# Altium PCB PCB.PcbDoc (part 5 of 6)
Units mm, origin at the board's own origin, x right, y up, seen from the top; angles counter-clockwise.
Board outline 56.61 x 57.68 mm, 2 copper layers (Top Layer, Bottom Layer), stack 0.572 mm thick; 104 components, 100 nets, 551 pads, 332 vias.
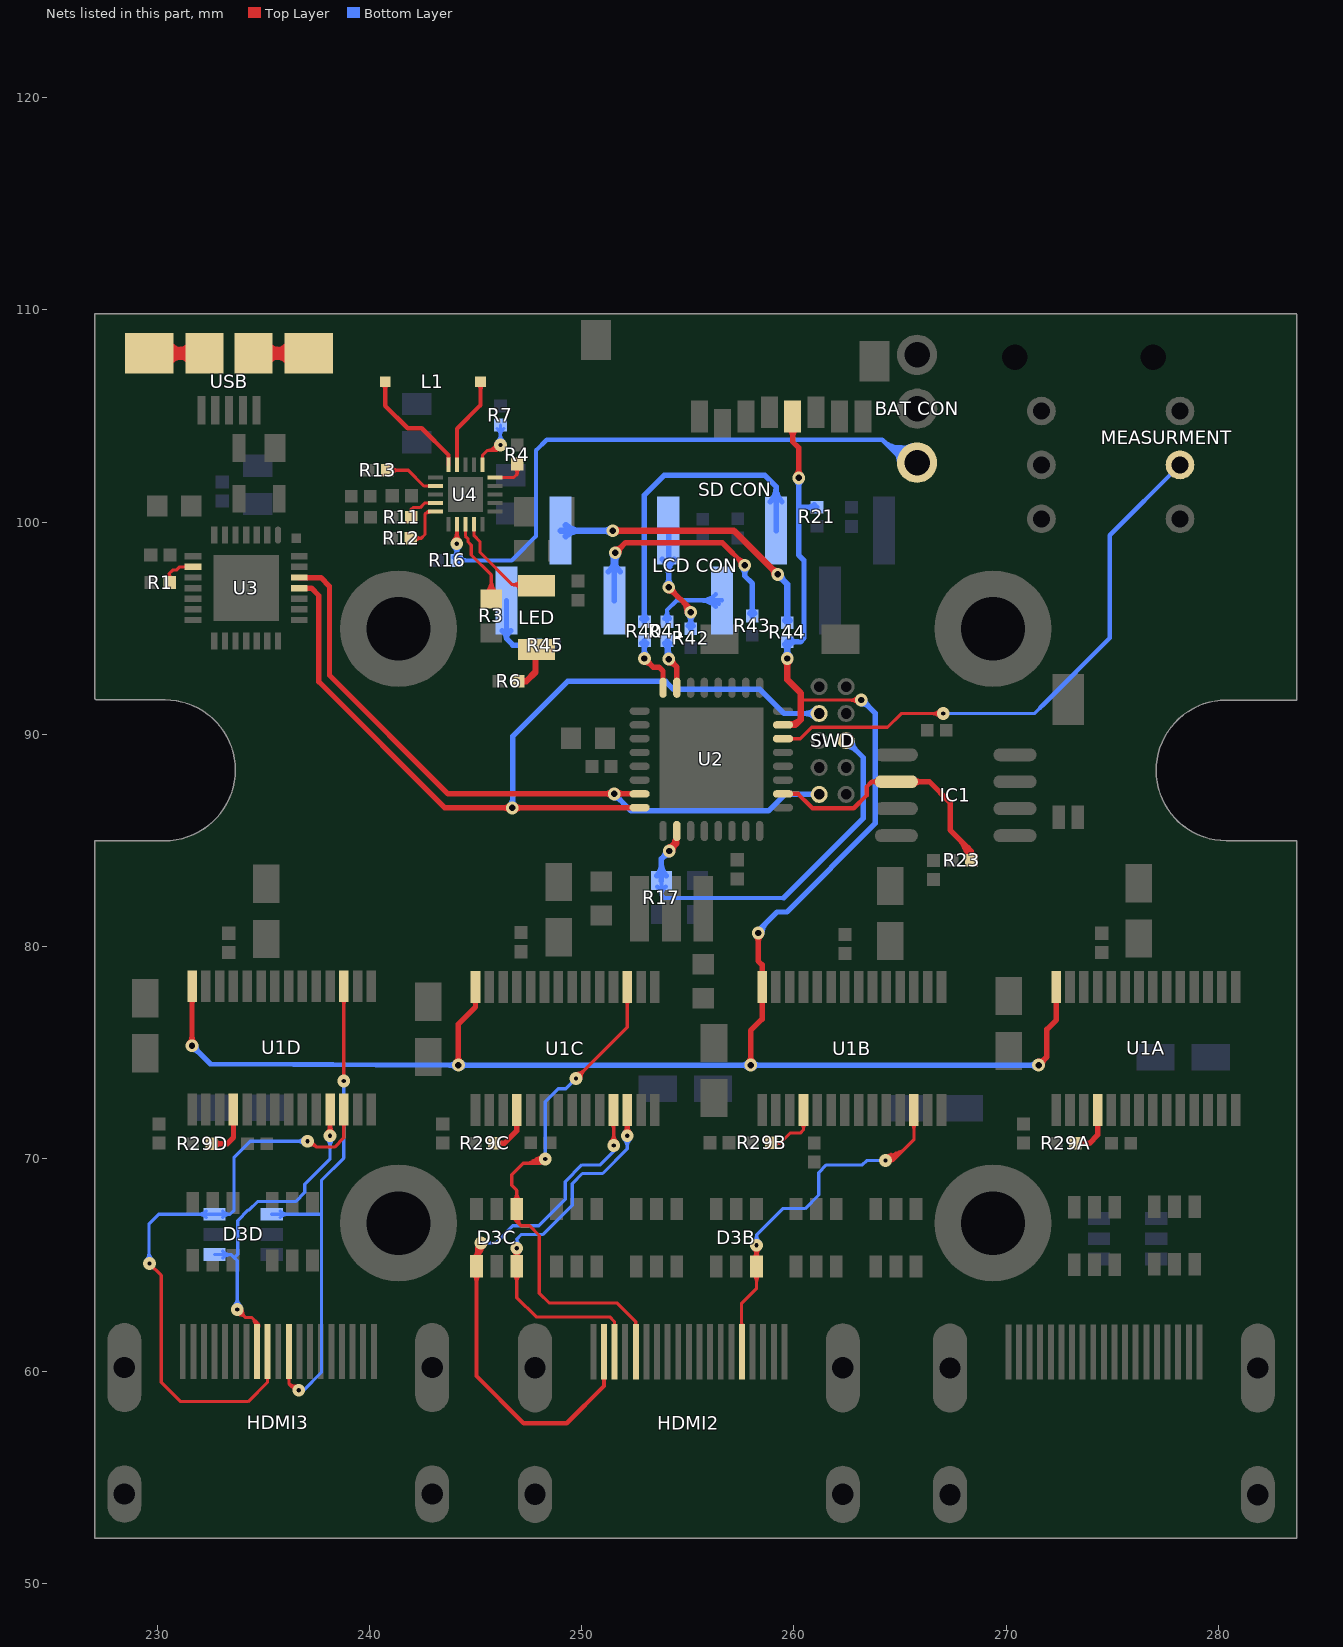
[diagram p5: the nets of this part, all layers, seen from the top]

## Via types
v1: diameter 0.6, hole 0.3, Top Layer to Bottom Layer, tented both sides, 242 vias
v2: diameter 0.6, hole 0.2, Top Layer to Bottom Layer, tented both sides, 80 vias
v3: diameter 0.8, hole 0.4, Top Layer to Bottom Layer, tented both sides, 9 vias
v4: diameter 0.66, hole 0.33, Top Layer to Bottom Layer, tented both sides, 1 vias

## Nets (pads, with @x,y where several pads share a name; then routed paths per layer and width w, separated by ;. In a path a pad name is that pad's centre, name@x,y a point inside that pad or via, vN(x,y) a via of type N, cw(c..) or ccw(c..) an arc to the next point about the centre after c; other vN are vias at no path point) (continued)
NetD3B_6: D3B.6 HDMI2.5 U1B.12 | length 36.6
  Top Layer w0.152: HDMI2.5@257.535,60.947 257.535,63.2 258.242,63.906 v2(258.242,65.938) ; D3B.6@258.118,65.355 ccw(c258.02,65.512) 258.199,65.559 ; D3B.6@258.125,65.359 ccw(c257.949,65.663) 258.288,65.572 ; 258.201,65.552 ccw(c258.508,65.634) D3B.6@258.349,65.359 ; 258.289,65.575 ccw(c258.499,65.519) D3B.6@258.37,65.345 ; v2@264.242,69.967 cw(c264.712,69.695) 264.572,70.219 ; v2(264.312,69.926) 264.668,69.926 ; v2@264.374,69.891 cw(c265.163,69.435) 264.927,70.315 ; v2@264.376,69.893 cw(c264.701,69.721) 264.606,70.076 ; v2@264.424,70.12 ccw(c264.577,70.384) 264.656,70.09 ; U1B.12@265.65,72.3 265.65,70.909 264.668,69.926 ; v2@258.113,65.756 cw(c257.994,65.588) 258.193,65.535 ; v2@258.113,65.756 cw(c257.994,65.588) 258.193,65.535 ; v2@258.113,65.756 cw(c257.994,65.588) 258.193,65.535 ; v2@258.13,65.745 cw(c257.968,65.464) 258.281,65.548 ; v2@258.13,65.745 cw(c257.968,65.464) 258.281,65.548 ; v2@258.13,65.745 cw(c257.968,65.464) 258.281,65.548 ; 258.193,65.535 cw(c258.526,65.446) v2@258.354,65.745 ; 258.193,65.535 cw(c258.526,65.446) v2@258.354,65.745 ; 258.193,65.535 cw(c258.526,65.446) v2@258.354,65.745 ; D3B.6@258.242,65.398 ccw(c257.702,65.398) 258.084,65.78 cw(c257.702,65.398) D3B.6@258.242,65.398 ; D3B.6@258.242,65.398 cw(c258.782,65.398) 258.4,65.78 ccw(c258.782,65.398) D3B.6@258.242,65.398 ; 258.283,65.538 cw(c258.472,65.588) v2@258.365,65.751 ; 258.283,65.538 cw(c258.472,65.588) v2@258.365,65.751 ; 258.283,65.538 cw(c258.472,65.588) v2@258.365,65.751 ; 264.668,69.926 ccw(c264.668,69.756) 264.514,69.829 cw(c264.668,69.756) 264.668,69.926 ; 264.668,69.926 cw(c264.668,70.097) 264.514,70.023 ccw(c264.668,70.097) 264.668,69.926 ; 265.65,71.416 ccw(c265.291,71.416) 265.545,71.67 cw(c265.291,71.416) 265.65,71.416 ; 265.65,71.416 cw(c266.01,71.416) 265.756,71.67 ccw(c266.01,71.416) 265.65,71.416 ; 257.535,62.279 ccw(c257.747,62.279) 257.598,62.129 cw(c257.747,62.279) 257.535,62.279 ; D3B.6@258.079,64.557 cw(c257.684,64.163) 258.242,64.163 ccw(c257.684,64.163) D3B.6@258.079,64.557 ; D3B.6@258.079,65.323 ccw(c257.684,65.718) 258.242,65.718 cw(c257.684,65.718) D3B.6@258.079,65.323 ; 258.242,64.187 cw(c258.765,64.187) 258.395,64.557 ccw(c258.765,64.187) 258.242,64.187 ; v2@258.242,65.693 ccw(c258.765,65.693) 258.395,65.323 cw(c258.765,65.693) v2@258.242,65.693 ; v2@264.312,69.845 ccw(c264.312,70.508) 264.781,70.039 cw(c264.312,70.508) v2@264.312,69.845 ; v2@264.312,69.998 ccw(c264.312,71.028) 265.041,70.3 cw(c264.312,71.028) v2@264.312,69.998 ; v2@264.312,70.15 ccw(c264.312,71.549) 265.301,70.56 cw(c264.312,71.549) v2@264.312,70.15
  Bottom Layer w0.152: v2(258.242,65.938) 258.242,66.432 ; 259.523,67.666 259.639,67.666 ; v2(264.312,69.926) 263.423,69.926 263.22,69.723 261.533,69.723 261.168,69.358 261.168,68.305 260.528,67.666 259.639,67.666 ; 258.242,66.432 ccw(c258.674,66.432) 258.389,66.107 cw(c258.674,66.432) 258.242,66.432 ; 258.242,66.432 cw(c257.81,66.432) 258.094,66.107 ccw(c257.81,66.432) 258.242,66.432 ; 258.242,66.432 259.475,67.666 259.639,67.666
NetD3C_1: D3C.1 HDMI2.15 U1C.17 | length 39.5
  Top Layer w0.152: 247.682,69.904 cw(c247.866,69.585) v2@248.126,69.845 ; 247.853,70.003 cw(c248.011,69.73) v2@248.234,69.952 ; 247.881,69.849 cw(c247.998,69.646) v2@248.145,69.828 ; 247.927,69.875 ccw(c247.774,70.139) v2@248.069,70.06 ; v2(248.285,70.002) 248.082,69.799 247.244,69.799 246.71,69.266 246.71,68.758 246.949,68.519 D3C.1@246.949,67.644 246.949,67.046 ; v2@249.653,73.803 cw(c249.972,73.738) 249.888,74.052 ; v2(249.733,73.787) 252.15,76.205 252.15,76.454 ; v2@249.749,73.708 ccw(c249.684,74.027) 249.998,73.942 ; 252.15,76.357 252.15,76.454 ; U1C.17@252.15,78.1 252.15,76.454 ; HDMI2.15@252.552,60.922 252.552,62.332 251.663,63.221 248.463,63.221 248.006,63.678 248.006,66.396 247.548,66.853 247.142,66.853 ; 246.949,67.046 ccw(c246.75,67.046) 246.844,67.222 cw(c246.75,67.046) 246.949,67.046 ; 246.949,67.046 cw(c247.148,67.046) 247.054,67.222 ccw(c247.148,67.046) 246.949,67.046 ; 246.949,67.046 247.142,66.853 ; 246.949,68.409 ccw(c247.489,68.409) 247.107,68.027 cw(c247.489,68.409) 246.949,68.409 ; 246.949,68.409 cw(c246.409,68.409) 246.791,68.027 ccw(c246.409,68.409) 246.949,68.409 ; 247.142,66.853 cw(c247.365,67.076) 247.122,67.277 ccw(c247.365,67.076) 247.142,66.853 ; 250.115,74.169 ccw(c250.497,73.787) 249.957,73.787 cw(c250.497,73.787) 250.115,74.169 ; 250.115,74.169 cw(c249.733,74.551) 249.733,74.011 ccw(c249.733,74.551) 250.115,74.169 ; 252.15,77.216 ccw(c251.791,77.216) 252.045,77.47 cw(c251.791,77.216) 252.15,77.216 ; 252.15,77.216 cw(c252.51,77.216) 252.256,77.47 ccw(c252.51,77.216) 252.15,77.216 ; 252.552,62.238 ccw(c252.707,62.238) 252.598,62.129 cw(c252.707,62.238) 252.552,62.238 ; 252.552,62.237 cw(c252.399,62.237) 252.507,62.129 ccw(c252.399,62.237) 252.552,62.237 ; D3C.1@246.887,67.471 ccw(c247.105,67.29) 246.905,67.09 cw(c247.105,67.29) D3C.1@246.887,67.471 ; D3C.1@247.004,67.374 ccw(c247.235,67.183) 247.023,66.971 cw(c247.235,67.183) D3C.1@247.004,67.374 ; 247.254,69.799 ccw(c247.254,71.033) 248.127,70.161 cw(c247.254,71.033) 247.254,69.799 ; 247.622,69.799 ccw(c247.622,70.665) 248.235,70.053 cw(c247.622,70.665) 247.622,69.799 ; 247.99,69.799 ccw(c247.99,70.297) 248.342,69.945 cw(c247.99,70.297) 247.99,69.799
  Bottom Layer w0.152: v2(248.285,70.002) 248.285,72.695 248.899,73.309 249.255,73.309 v2(249.733,73.787)
NetD3C_4: D3C.4 HDMI2.18 U1C.11 | length 43.2
  Top Layer w0.152: D3C.4@244.937,65.363 ccw(c244.748,65.69) 245.113,65.592 ; D3C.4@245.049,64.944 245.049,65.827 ; v2@245.083,65.906 cw(c244.874,65.751) 245.1,65.62 ; v2@245.102,65.884 cw(c244.832,65.621) D3C.4@245.157,65.431 ; 245.135,65.682 cw(c245.399,65.529) v2@245.32,65.824 ; 245.148,65.723 ccw(c245.624,65.596) D3C.4@245.229,65.302 ; 245.205,65.567 ccw(c245.57,65.47) D3C.4@245.243,65.281 ; v2@245.211,65.99 cw(c244.981,65.766) 245.258,65.604 ; v2(245.262,66.04) 245.049,65.827 ; v2(251.511,70.637) 251.511,71.476 ; 251.511,71.349 251.511,71.476 ; U1C.11@251.511,72.29 251.511,71.476 ; 245.049,65.709 ccw(c245.589,65.709) 245.207,65.327 cw(c245.589,65.709) 245.049,65.709 ; 245.049,65.709 cw(c244.509,65.709) 244.891,65.327 ccw(c244.509,65.709) 245.049,65.709 ; 245.049,65.827 ccw(c244.984,65.891) 245.065,65.935 cw(c244.984,65.891) 245.049,65.827 ; 245.049,65.827 cw(c245.114,65.762) 245.157,65.843 ccw(c245.114,65.762) 245.049,65.827 ; U1C.11@251.395,71.67 cw(c251.116,71.391) 251.511,71.391 ; U1C.11@251.395,71.67 cw(c251.116,71.391) 251.511,71.391 ; U1C.11@251.395,71.67 cw(c251.116,71.391) 251.511,71.391 ; U1C.11@251.395,71.67 cw(c251.116,71.391) 251.511,71.391 ; U1C.11@251.417,71.652 cw(c251.298,71.475) 251.511,71.475 ; U1C.11@251.417,71.652 cw(c251.298,71.475) 251.511,71.475 ; U1C.11@251.417,71.652 cw(c251.298,71.475) 251.511,71.475 ; U1C.11@251.417,71.652 cw(c251.298,71.475) 251.511,71.475 ; U1C.11@251.417,71.652 cw(c251.298,71.475) 251.511,71.475 ; U1C.11@251.417,71.652 cw(c251.298,71.475) 251.511,71.475 ; 251.511,71.178 ccw(c252.051,71.178) 251.669,70.796 cw(c252.051,71.178) 251.511,71.178 ; 251.511,71.178 cw(c250.971,71.178) 251.353,70.796 ccw(c250.971,71.178) 251.511,71.178 ; 251.511,71.441 cw(c251.835,71.441) U1C.11@251.606,71.67 ; 251.511,71.441 cw(c251.835,71.441) U1C.11@251.606,71.67 ; 251.511,71.441 cw(c251.835,71.441) U1C.11@251.606,71.67 ; 251.511,71.441 cw(c251.835,71.441) U1C.11@251.606,71.67 ; 251.511,71.475 cw(c251.755,71.475) U1C.11@251.597,71.662 ; 251.511,71.475 cw(c251.755,71.475) U1C.11@251.597,71.662 ; 251.511,71.475 cw(c251.755,71.475) U1C.11@251.597,71.662 ; 251.511,71.475 cw(c251.755,71.475) U1C.11@251.597,71.662 ; 251.511,71.475 cw(c251.755,71.475) U1C.11@251.597,71.662 ; 251.511,71.475 cw(c251.755,71.475) U1C.11@251.597,71.662 ; D3C.4@245.049,64.985 cw(c246.318,64.985) 245.421,65.882 ccw(c246.318,64.985) D3C.4@245.049,64.985 ; D3C.4@245.049,65.352 cw(c245.95,65.352) 245.313,65.99 ccw(c245.95,65.352) D3C.4@245.049,65.352 ; 245.049,65.72 cw(c245.582,65.72) 245.205,66.097 ccw(c245.582,65.72) 245.049,65.72
  Top Layer w0.203: D3C.4@245.049,64.944 245.049,59.776 247.269,57.556 249.301,57.556 251.052,59.308 HDMI2.18@251.052,60.924 ; 245.049,64.24 ccw(c244.57,64.24) 244.909,64.579 cw(c244.57,64.24) 245.049,64.24 ; 245.049,64.24 cw(c245.528,64.24) 245.189,64.579 ccw(c245.528,64.24) 245.049,64.24
  Bottom Layer w0.152: v2(245.262,66.04) 245.948,66.04 246.761,66.853 247.98,66.853 249.225,68.097 249.225,68.936 250.012,69.723 250.876,69.723 251.511,70.358 v2(251.511,70.637) v2@251.511,70.561
NetD3C_6: D3C.6 HDMI2.17 U1C.12 | length 33.3
  Top Layer w0.152: D3C.6@246.834,65.361 ccw(c246.775,65.461) 246.887,65.491 ccw(c247.026,65.528) D3C.6@246.996,65.388 ; D3C.6@246.902,65.388 ccw(c246.872,65.528) 247.011,65.491 ccw(c247.123,65.461) D3C.6@247.064,65.361 ; v2(246.949,65.801) D3C.6@246.949,64.944 246.949,63.464 247.853,62.56 251.333,62.56 251.55,62.343 HDMI2.17@251.55,60.92 ; U1C.12@252.035,71.681 cw(c251.813,71.498) 252.091,71.424 ; U1C.12@252.076,71.646 cw(c251.963,71.451) 252.181,71.509 ; 252.111,71.497 cw(c252.347,71.434) U1C.12@252.225,71.646 ; v2(252.146,71.095) 252.15,71.099 U1C.12@252.15,72.3 ; 252.203,71.427 cw(c252.465,71.497) U1C.12@252.262,71.676 ; v2@246.834,65.609 cw(c246.775,65.509) 246.887,65.479 ; v2@246.834,65.609 cw(c246.775,65.509) 246.887,65.479 ; v2@246.834,65.609 cw(c246.775,65.509) 246.887,65.479 ; 246.887,65.479 cw(c247.026,65.442) v2@246.996,65.582 ; 246.887,65.479 cw(c247.026,65.442) v2@246.996,65.582 ; 246.887,65.479 cw(c247.026,65.442) v2@246.996,65.582 ; v2@246.902,65.582 cw(c246.872,65.442) 247.011,65.479 ; v2@246.902,65.582 cw(c246.872,65.442) 247.011,65.479 ; v2@246.902,65.582 cw(c246.872,65.442) 247.011,65.479 ; 246.949,64.179 ccw(c246.409,64.179) 246.791,64.561 cw(c246.409,64.179) 246.949,64.179 ; 246.949,64.179 cw(c247.489,64.179) 247.107,64.561 ccw(c247.489,64.179) 246.949,64.179 ; D3C.6@246.949,65.261 ccw(c246.409,65.261) 246.791,65.643 cw(c246.409,65.261) D3C.6@246.949,65.261 ; D3C.6@246.949,65.261 cw(c247.489,65.261) 247.107,65.643 ccw(c247.489,65.261) D3C.6@246.949,65.261 ; v2@246.949,65.709 ccw(c247.489,65.709) 247.107,65.327 cw(c247.489,65.709) v2@246.949,65.709 ; v2@246.949,65.709 cw(c246.409,65.709) 246.791,65.327 ccw(c246.409,65.709) v2@246.949,65.709 ; 247.011,65.479 cw(c247.123,65.509) v2@247.064,65.609 ; 247.011,65.479 cw(c247.123,65.509) v2@247.064,65.609 ; 247.011,65.479 cw(c247.123,65.509) v2@247.064,65.609 ; 252.15,71.416 ccw(c251.791,71.416) 252.045,71.67 cw(c251.791,71.416) 252.15,71.416 ; 252.15,71.416 cw(c252.51,71.416) 252.256,71.67 ccw(c252.51,71.416) 252.15,71.416 ; HDMI2.17@251.507,62.129 ccw(c251.404,62.232) 251.55,62.232 cw(c251.404,62.232) HDMI2.17@251.507,62.129 ; 251.55,62.243 ccw(c251.712,62.243) 251.598,62.129 cw(c251.712,62.243) 251.55,62.243 ; v2@251.988,71.253 ccw(c251.594,71.646) 252.15,71.646 cw(c251.594,71.646) v2@251.988,71.253 ; U1C.12@252.15,71.624 ccw(c252.675,71.624) 252.304,71.253 cw(c252.675,71.624) U1C.12@252.15,71.624
  Bottom Layer w0.152: v2(246.949,65.801) 246.949,66.229 ; v2(252.146,71.095) 252.149,71.095 252.15,71.093 252.15,70.479 250.988,69.317 250.037,69.317 249.555,68.835 249.555,67.818 248.183,66.446 247.167,66.446 246.949,66.229 ; 246.949,66.229 ccw(c247.245,66.229) 247.077,65.985 cw(c247.245,66.229) 246.949,66.229 ; 246.949,66.229 cw(c246.653,66.229) 246.821,65.985 ccw(c246.653,66.229) 246.949,66.229 ; v2@251.988,70.936 cw(c251.594,70.543) 252.15,70.543 ccw(c251.594,70.543) v2@251.988,70.936 ; 252.15,70.565 cw(c252.675,70.565) 252.304,70.936 ccw(c252.675,70.565) 252.15,70.565
NetD3D_1: D3D.1 HDMI3.9 U1D.17 | length 30.8
  Top Layer w0.152: HDMI3.9@236.211,60.935 236.211,59.42 ; 236.344,59.311 cw(c236.362,58.768) v2@236.732,59.165 ; v2(236.677,59.106) 236.525,59.106 236.211,59.42 ; v2(238.8,73.67) 238.8,76.606 ; 238.8,75.555 238.8,76.606 ; U1D.17@238.8,78.139 238.8,76.606 ; 236.211,59.42 ccw(c236.495,59.704) 236.612,59.32 cw(c236.495,59.704) 236.211,59.42 ; 236.211,59.621 ccw(c236.057,59.621) 236.165,59.729 cw(c236.057,59.621) 236.211,59.621 ; 236.211,59.621 cw(c236.365,59.621) 236.256,59.729 ccw(c236.365,59.621) 236.211,59.621 ; 238.8,77.255 ccw(c238.441,77.255) 238.695,77.509 cw(c238.441,77.255) 238.8,77.255 ; 238.8,77.255 cw(c239.16,77.255) 238.906,77.509 ccw(c239.16,77.255) 238.8,77.255 ; 236.39,59.241 ccw(c236.579,59.429) 236.656,59.174 cw(c236.579,59.429) 236.39,59.241
  Bottom Layer w0.152: D3D.1@235.407,67.396 236.626,67.396 ; v2(236.677,59.106) 236.906,59.106 237.744,59.944 237.744,68.986 238.785,70.028 ; 236.692,67.396 236.626,67.396 ; 237.2,67.396 237.109,67.396 ; 237.708,67.396 237.109,67.396 ; 238.8,70.043 v2(238.8,73.67) ; 236.172,67.396 ccw(c236.172,66.856) 235.79,67.238 cw(c236.172,66.856) 236.172,67.396 ; 236.172,67.396 cw(c236.172,67.937) 235.79,67.555 ccw(c236.172,67.937) 236.172,67.396 ; 236.626,67.396 237.109,67.396
NetD3D_4: D3D.4 HDMI3.12 U1D.11 | length 29.3
  Top Layer w0.152: v2@233.702,62.899 ccw(c234.022,62.966) 233.938,62.651 ; v2(233.782,62.916) 234.163,62.535 ; v2@233.798,62.995 cw(c233.731,62.676) 234.047,62.759 ; 234.576,62.373 ccw(c234.929,62.463) HDMI3.12@234.743,62.15 ; HDMI3.12@234.711,60.935 234.711,62.292 234.467,62.535 ; U1D.11@238.037,71.718 cw(c237.805,71.521) 238.099,71.442 ; U1D.11@238.076,71.685 cw(c237.976,71.511) 238.17,71.563 ; 238.131,71.563 cw(c238.325,71.511) U1D.11@238.225,71.685 ; v2(238.15,71.095) U1D.11@238.15,72.339 ; 238.202,71.442 cw(c238.496,71.521) U1D.11@238.264,71.718 ; 234.163,62.535 ccw(c233.783,62.155) 233.782,62.692 cw(c233.783,62.155) 234.163,62.535 ; 234.163,62.535 cw(c234.542,62.914) 234.005,62.915 ccw(c234.542,62.914) 234.163,62.535 ; 234.163,62.535 234.467,62.535 ; 234.467,62.535 cw(c234.034,62.102) 234.647,62.095 ccw(c234.034,62.102) 234.467,62.535 ; 234.711,62.249 ccw(c234.865,62.249) 234.756,62.14 cw(c234.865,62.249) 234.711,62.249 ; 234.711,62.249 cw(c234.557,62.249) 234.665,62.14 ccw(c234.557,62.249) 234.711,62.249 ; 238.15,71.455 ccw(c237.791,71.455) 238.045,71.709 cw(c237.791,71.455) 238.15,71.455 ; 238.15,71.455 cw(c238.51,71.455) 238.256,71.709 ccw(c238.51,71.455) 238.15,71.455 ; U1D.11@238.15,71.635 ccw(c238.691,71.635) 238.309,71.253 cw(c238.691,71.635) U1D.11@238.15,71.635 ; U1D.11@238.15,71.635 cw(c237.61,71.635) 237.992,71.253 ccw(c237.61,71.635) U1D.11@238.15,71.635 ; 234.724,62.278 cw(c234.542,62.096) 234.799,62.094 ccw(c234.542,62.096) 234.724,62.278
  Bottom Layer w0.152: D3D.4@232.707,65.496 233.504,65.496 233.643,65.357 ; v2(233.782,62.916) 233.782,65.218 233.643,65.357 ; v2(238.15,71.095) 238.15,70.002 236.957,68.809 236.957,68.428 236.525,67.996 234.732,67.996 234.339,67.602 234.302,67.602 233.8,67.1 233.8,65.515 233.643,65.357 ; 233.472,65.496 ccw(c233.472,64.956) 233.09,65.338 cw(c233.472,64.956) 233.472,65.496 ; 233.472,65.496 cw(c233.472,66.037) 233.09,65.655 ccw(c233.472,66.037) 233.472,65.496 ; 233.782,63.456 ccw(c234.322,63.456) 233.94,63.074 cw(c234.322,63.456) 233.782,63.456 ; 233.782,63.456 cw(c233.241,63.456) 233.623,63.074 ccw(c233.241,63.456) 233.782,63.456 ; 238.15,70.554 ccw(c237.61,70.554) 237.992,70.936 cw(c237.61,70.554) 238.15,70.554 ; 238.15,70.554 cw(c238.691,70.554) 238.309,70.936 ccw(c238.691,70.554) 238.15,70.554
NetD3D_6: D3D.6 HDMI3.11 U1D.12 | length 39.2
  Top Layer w0.152: v2(229.641,65.075) 230.2,64.516 ; 230.2,64.491 230.2,59.487 231.115,58.572 234.29,58.572 235.204,59.487 HDMI3.11@235.204,60.928 ; v2(237.084,70.841) 237.236,70.841 237.515,70.561 ; U1D.12@238.8,72.339 238.8,70.997 238.365,70.561 237.515,70.561 ; 237.515,70.561 ccw(c237.287,70.333) 237.167,70.633 cw(c237.287,70.333) 237.515,70.561 ; 238.8,71.455 ccw(c238.441,71.455) 238.695,71.709 cw(c238.441,71.455) 238.8,71.455 ; 238.8,71.455 cw(c239.16,71.455) 238.906,71.709 ccw(c239.16,71.455) 238.8,71.455 ; 235.204,59.605 cw(c235.381,59.605) 235.256,59.729 ccw(c235.381,59.605) 235.204,59.605
  Bottom Layer w0.152: v2(229.641,65.075) 229.616,65.1 229.616,66.929 230.083,67.396 D3D.6@232.707,67.396 233.436,67.396 ; 233.629,69.342 233.629,69.52 ; v2@236.906,70.841 236.601,70.841 ; v2(237.084,70.841) 236.601,70.841 ; 231.942,67.396 ccw(c231.942,67.937) 232.324,67.555 cw(c231.942,67.937) 231.942,67.396 ; 231.942,67.396 cw(c231.942,66.856) 232.324,67.238 ccw(c231.942,66.856) 231.942,67.396 ; 233.436,67.396 ccw(c233.436,66.941) 233.098,67.246 cw(c233.436,66.941) 233.436,67.396 ; 233.436,67.396 cw(c233.436,67.852) 233.098,67.546 ccw(c233.436,67.852) 233.436,67.396 ; 233.436,67.396 233.629,67.589 233.629,69.52 ; 233.629,69.52 233.629,70.079 234.391,70.841 236.601,70.841 ; 236.601,70.841 ccw(c236.601,71.249) v2@236.913,70.985 ; 236.601,70.841 cw(c236.601,70.432) v2@236.913,70.696 ; 236.601,70.841 ccw(c236.601,71.249) v2@236.913,70.985 ; 236.601,70.841 cw(c236.601,70.432) v2@236.913,70.696 ; 236.601,70.841 ccw(c236.601,71.249) v2@236.913,70.985 ; 236.601,70.841 cw(c236.601,70.432) v2@236.913,70.696 ; 236.601,70.841 ccw(c236.601,71.249) v2@236.913,70.985 ; 236.601,70.841 cw(c236.601,70.432) v2@236.913,70.696 ; v2@229.483,65.233 ccw(c229.162,65.554) 229.616,65.554 cw(c229.162,65.554) v2@229.483,65.233 ; 229.616,65.676 ccw(c230.243,65.676) 229.8,65.233 cw(c230.243,65.676) 229.616,65.676
NetL1_1: L1.1 U4.10 | length 6.7
  Top Layer w0.203: L1.1@240.743,106.604 240.743,105.485 241.808,104.419 242.468,104.419 243.725,103.162 U4.10@243.725,102.7 ; 240.743,106.246 ccw(c240.384,106.246) 240.638,106.499 cw(c240.384,106.246) 240.743,106.246 ; 240.743,106.246 cw(c241.101,106.246) 240.848,106.499 ccw(c241.101,106.246) 240.743,106.246
NetL1_2: L1.2 U4.9 | length 5.5
  Top Layer w0.203: U4.9@244.125,102.7 244.125,104.4 245.237,105.512 L1.2@245.237,106.604 ; 245.237,106.246 ccw(c244.879,106.246) 245.132,106.499 cw(c244.879,106.246) 245.237,106.246 ; 245.237,106.246 cw(c245.595,106.246) 245.342,106.499 ccw(c245.595,106.246) 245.237,106.246
"NetLCD CON_3": "LCD CON.3" R40.2 | length 19.1
  Bottom Layer w0.254: R40.2@252.959,95.312 252.959,101.27 253.898,102.21 258.623,102.21 259.16,101.672 259.16,99.602 ; 252.959,95.729 ccw(c253.376,95.729) 253.081,95.434 cw(c253.376,95.729) 252.959,95.729 ; 252.959,95.729 cw(c252.541,95.729) 252.836,95.434 ccw(c252.541,95.729) 252.959,95.729 ; 259.16,101.632 ccw(c260.11,101.632) 259.438,100.96 cw(c260.11,101.632) 259.16,101.632 ; 259.16,101.632 cw(c258.21,101.632) 258.882,100.96 ccw(c258.21,101.632) 259.16,101.632
"NetLCD CON_4": "LCD CON.4" R41.2 | length 8.9
  Bottom Layer w0.203: R41.2@254.025,95.312 254.025,95.86 254.478,96.312 256.608,96.312 ; 254.025,95.791 ccw(c254.504,95.791) 254.166,95.452 cw(c254.504,95.791) 254.025,95.791 ; 254.025,95.791 cw(c253.546,95.791) 253.885,95.452 ccw(c253.546,95.791) 254.025,95.791 ; 255.579,96.312 cw(c255.579,95.259) 256.324,96.004 ccw(c255.579,95.259) 255.579,96.312 ; 255.637,96.312 ccw(c255.637,97.283) 256.324,96.596 cw(c255.637,97.283) 255.637,96.312 ; 256.07,96.312 cw(c256.07,95.75) 256.467,96.147 ccw(c256.07,95.75) 256.07,96.312
"NetLCD CON_5": "LCD CON.5" R42.2 | length 14.4
  Top Layer w0.254: v1(254.102,96.926) 255.143,95.885 v1(255.143,95.758) ; 254.397,96.631 ccw(c254.102,96.336) 254.102,96.753 cw(c254.102,96.336) 254.397,96.631 ; 254.397,96.631 cw(c254.692,96.926) 254.275,96.926 ccw(c254.692,96.926) 254.397,96.631 ; 254.758,96.27 cw(c254.246,95.758) 254.97,95.758 ccw(c254.246,95.758) 254.758,96.27
  Bottom Layer w0.254: v1(254.102,96.926) 254.102,99.58 ; R42.2@255.143,94.982 v1(255.143,95.758) ; 254.102,97.344 ccw(c254.519,97.344) 254.224,97.049 cw(c254.519,97.344) 254.102,97.344 ; 254.102,97.344 cw(c253.684,97.344) 253.979,97.049 ccw(c253.684,97.344) 254.102,97.344 ; 255.143,95.34 ccw(c254.725,95.34) 255.021,95.636 cw(c254.725,95.34) 255.143,95.34 ; 255.143,95.34 cw(c255.561,95.34) 255.265,95.636 ccw(c255.561,95.34) 255.143,95.34 ; 255.143,95.399 ccw(c255.561,95.399) 255.265,95.104 cw(c255.561,95.399) 255.143,95.399 ; 255.143,95.399 cw(c254.725,95.399) 255.021,95.104 ccw(c254.725,95.399) 255.143,95.399 ; 253.802,98.244 cw(c253.077,97.52) 254.102,97.52 ccw(c253.077,97.52) 253.802,98.244 ; 254.102,97.624 cw(c254.978,97.624) 254.358,98.244 ccw(c254.978,97.624) 254.102,97.624
"NetLCD CON_6": "LCD CON.6" R43.2 | length 24
  Top Layer w0.254: v1(251.587,98.552) 252.07,99.035 256.616,99.035 v1(257.683,97.968) ; 251.882,98.847 ccw(c252.178,98.552) 251.76,98.552 cw(c252.178,98.552) 251.882,98.847 ; 251.882,98.847 cw(c251.587,99.143) 251.587,98.725 ccw(c251.587,99.143) 251.882,98.847 ; 257.388,98.263 ccw(c257.683,98.558) 257.683,98.141 cw(c257.683,98.558) 257.388,98.263 ; 257.388,98.263 cw(c257.092,97.968) 257.51,97.968 ccw(c257.092,97.968) 257.388,98.263
  Bottom Layer w0.254: 251.536,96.304 251.536,98.501 v1(251.587,98.552) ; v1(257.683,97.968) 257.683,97.46 258.039,97.104 R43.2@258.039,95.573 ; v1@251.437,98.466 cw(c251.044,98.238) 251.483,98.121 ; v1@251.437,98.466 cw(c251.044,98.238) 251.483,98.121 ; v1@251.437,98.466 cw(c251.044,98.238) 251.483,98.121 ; 251.496,98.171 cw(c251.864,98.072) v1@251.673,98.402 ; 251.496,98.171 cw(c251.864,98.072) v1@251.673,98.402 ; 251.496,98.171 cw(c251.864,98.072) v1@251.673,98.402 ; 251.619,98.032 cw(c252.04,98.145) v1@251.716,98.436 ; 251.619,98.032 cw(c252.04,98.145) v1@251.716,98.436 ; 251.619,98.032 cw(c252.04,98.145) v1@251.716,98.436 ; 257.683,97.55 ccw(c257.265,97.55) 257.561,97.845 cw(c257.265,97.55) 257.683,97.55 ; 257.683,97.55 cw(c258.101,97.55) 257.805,97.845 ccw(c258.101,97.55) 257.683,97.55 ; 258.039,95.991 ccw(c258.456,95.991) 258.161,95.695 cw(c258.456,95.991) 258.039,95.991 ; 258.039,95.991 cw(c257.621,95.991) 257.916,95.695 ccw(c257.621,95.991) 258.039,95.991 ; 251.262,97.658 ccw(c250.599,98.321) 251.536,98.321 cw(c250.599,98.321) 251.262,97.658 ; 251.536,98.012 cw(c252.127,98.012) 251.709,98.43 ccw(c252.127,98.012) 251.536,98.012 ; v1@251.536,98.339 ccw(c252.5,98.339) 251.818,97.658 cw(c252.5,98.339) v1@251.536,98.339
"NetLCD CON_7": "LCD CON.7" R44.2 | length 21.9
  Top Layer w0.305: v1(251.46,99.593) 257.175,99.593 v1(259.232,97.536) ; 251.816,99.593 ccw(c251.816,99.237) 251.564,99.489 cw(c251.816,99.237) 251.816,99.593 ; 251.816,99.593 cw(c251.816,99.95) 251.564,99.698 ccw(c251.816,99.95) 251.816,99.593 ; 258.98,97.788 ccw(c259.232,98.04) 259.232,97.684 cw(c259.232,98.04) 258.98,97.788 ; 258.98,97.788 cw(c258.728,97.536) 259.085,97.536 ccw(c258.728,97.536) 258.98,97.788
  Bottom Layer w0.305: 249.009,99.593 v1(251.46,99.593) ; v1(259.232,97.536) 259.69,97.079 R44.2@259.69,95.261 ; 251.104,99.593 ccw(c251.104,99.95) 251.356,99.698 cw(c251.104,99.95) 251.104,99.593 ; 251.104,99.593 cw(c251.104,99.237) 251.356,99.489 ccw(c251.104,99.237) 251.104,99.593 ; 259.484,97.284 ccw(c259.232,97.032) 259.232,97.388 cw(c259.232,97.032) 259.484,97.284 ; 259.484,97.284 cw(c259.736,97.536) 259.38,97.536 ccw(c259.736,97.536) 259.484,97.284 ; 259.69,95.617 ccw(c260.046,95.617) 259.794,95.365 cw(c260.046,95.617) 259.69,95.617 ; 259.69,95.617 cw(c259.333,95.617) 259.585,95.365 ccw(c259.333,95.617) 259.69,95.617 ; 249.26,99.342 cw(c249.868,98.734) 249.868,99.593 ccw(c249.868,98.734) 249.26,99.342 ; 249.26,99.862 ccw(c249.91,100.512) 249.91,99.593 cw(c249.91,100.512) 249.26,99.862
"NetLCD CON_8": "LCD CON.8" R45.2 | length 6.4
  Bottom Layer w0.254: 246.46,96.3 246.46,94.51 ; R45.2@247.835,94.209 246.761,94.209 246.46,94.51 ; 246.46,94.51 ccw(c246.015,94.51) 246.251,94.887 cw(c246.015,94.51) 246.46,94.51 ; 246.46,94.51 cw(c246.905,94.51) 246.669,94.887 ccw(c246.905,94.51) 246.46,94.51 ; 247.417,94.209 ccw(c247.417,94.626) 247.713,94.331 cw(c247.417,94.626) 247.417,94.209 ; 247.417,94.209 cw(c247.417,93.791) 247.713,94.086 ccw(c247.417,93.791) 247.417,94.209
NetLED_1: LED.1 U4.19 | length 8
  Top Layer w0.152: U4.19@244.925,99.9 244.925,99.371 245.212,99.085 245.212,98.577 246.73,97.059 ; LED.1@247.137,97.059 247.772,97.059 246.73,97.059 ; 246.73,97.059 ccw(c246.73,97.628) 247.173,97.271 cw(c246.73,97.628) 246.73,97.059 ; 246.73,97.059 cw(c246.73,96.617) 247.125,96.815 ccw(c246.73,96.617) 246.73,97.059 ; 246.977,97.059 cw(c246.977,96.741) 247.261,96.884 ccw(c246.977,96.741) 246.977,97.059
NetLED_2: LED.2 R6.1 | length 3.2
  Top Layer w0.305: R6.1@247.008,92.507 247.396,92.507 247.828,92.939 LED.2@247.828,94.003 ; 247.364,92.507 ccw(c247.364,92.15) 247.112,92.402 cw(c247.364,92.15) 247.364,92.507 ; 247.364,92.507 cw(c247.364,92.863) 247.112,92.611 ccw(c247.364,92.863) 247.364,92.507
NetMEASURMENT_3: MEASURMENT.3 U2.14 | length 29.5
  Top Layer w0.152: U2.14@259.483,89.799 260.303,89.799 260.845,90.341 264.408,90.341 265.049,90.983 v2(267.03,90.983) ; 260.022,89.799 ccw(c260.022,89.56) 259.853,89.729 cw(c260.022,89.56) 260.022,89.799 ; 260.022,89.799 cw(c260.022,90.037) 259.853,89.869 ccw(c260.022,90.037) 260.022,89.799 ; 266.49,90.983 ccw(c266.49,91.523) 266.872,91.141 cw(c266.49,91.523) 266.49,90.983 ; 266.49,90.983 cw(c266.49,90.443) 266.872,90.825 ccw(c266.49,90.443) 266.49,90.983
  Bottom Layer w0.152: v2(267.03,90.983) 271.323,90.983 271.716,91.376
  Bottom Layer w0.203: 271.602,91.262 271.716,91.376 274.879,94.539 274.879,99.385 MEASURMENT.3@278.186,102.692
NetR1_1: R1.1 U3.9 | length 3.4
  Top Layer w0.152: R1.1@230.574,97.155 230.574,97.58 ; U3.9@231.699,97.889 231.061,97.889 230.911,97.739 230.734,97.739 230.574,97.58 ; 230.574,97.58 ccw(c230.836,97.58) 230.709,97.35 cw(c230.836,97.58) 230.574,97.58 ; 230.574,97.58 cw(c230.244,97.58) 230.456,97.327 ccw(c230.244,97.58) 230.574,97.58 ; 231.27,97.889 ccw(c231.27,98.067) 231.396,97.941 cw(c231.27,98.067) 231.27,97.889 ; 231.27,97.889 cw(c231.27,97.711) 231.396,97.837 ccw(c231.27,97.711) 231.27,97.889
NetR3_2: R3.2 U4.18 | length 8.5
  Top Layer w0.152: U4.18@244.525,99.9 244.525,99.34 244.648,99.217 244.648,99.065 244.805,98.908 244.805,98.45 245.745,97.511 R3.2@245.745,96.38 ; 245.745,96.915 ccw(c246.28,96.915) 245.902,96.537 cw(c246.28,96.915) 245.745,96.915 ; 245.745,96.915 cw(c245.21,96.915) 245.588,96.537 ccw(c245.21,96.915) 245.745,96.915 ; 245.745,97.283 ccw(c246.647,97.283) 246.009,96.645 cw(c246.647,97.283) 245.745,97.283 ; 245.745,97.283 cw(c244.843,97.283) 245.481,96.645 ccw(c244.843,97.283) 245.745,97.283
NetR4_2: R4.2 U4.5 | length 3.3
  Top Layer w0.152: 246.296,102.1 U4.5@245.925,102.1 246.804,102.1 246.964,102.26 ; R4.2@246.964,102.732 246.964,102.26 ; 246.964,102.26 ccw(c246.579,102.26) 246.823,102.559 cw(c246.579,102.26) 246.964,102.26 ; 246.964,102.26 cw(c247.349,102.26) 247.106,102.559 ccw(c247.349,102.26) 246.964,102.26
NetR7_2: R7.2 U4.6 | length 9.5
  Top Layer w0.152: U4.6@245.325,102.7 245.325,103.136 245.567,103.378 ; v2(246.177,103.632) 245.923,103.378 ; 245.567,103.378 ccw(c245.567,103.782) 245.959,103.685 cw(c245.567,103.782) 245.567,103.378 ; 245.567,103.378 245.923,103.378 ; 245.923,103.378 ccw(c245.798,103.503) 245.965,103.56 cw(c245.798,103.503) 245.923,103.378 ; 245.923,103.378 cw(c246.048,103.253) 246.104,103.42 ccw(c246.048,103.253) 245.923,103.378 ; 245.762,103.378 ccw(c245.762,103.734) 246.107,103.649 cw(c245.762,103.734) 245.762,103.378 ; 245.956,103.378 ccw(c245.956,103.686) 246.255,103.613 cw(c245.956,103.686) 245.956,103.378
  Bottom Layer w0.152: v2(246.177,103.632) R7.2@246.177,104.572 ; 246.177,104.032 ccw(c245.637,104.032) 246.019,104.414 cw(c245.637,104.032) 246.177,104.032 ; 246.177,104.032 cw(c246.717,104.032) 246.335,104.414 ccw(c246.717,104.032) 246.177,104.032 ; 246.177,104.172 ccw(c246.717,104.172) 246.335,103.79 cw(c246.717,104.172) 246.177,104.172 ; 246.177,104.172 cw(c245.637,104.172) 246.019,103.79 ccw(c245.637,104.172) 246.177,104.172
NetR11_2: R11.2 U4.14 | length 2.5
  Top Layer w0.152: R11.2@241.979,100.228 241.979,100.602 ; U4.14@243.125,100.9 242.607,100.9 242.392,100.686 242.062,100.686 241.979,100.602 ; 241.979,100.602 ccw(c242.179,100.602) 242.084,100.426 cw(c242.179,100.602) 241.979,100.602 ; 241.979,100.602 cw(c241.778,100.602) 241.873,100.426 ccw(c241.778,100.602) 241.979,100.602
NetR12_2: R12.2 U4.15 | length 4.4
  Top Layer w0.152: R12.2@241.953,99.238 242.443,99.238 ; 242.769,100.455 ccw(c242.742,100.589) U4.15@242.856,100.513 ; U4.15@243.125,100.5 242.74,100.5 242.621,100.381 ; 242.443,99.238 ccw(c242.443,98.814) 242.122,99.091 cw(c242.443,98.814) 242.443,99.238 ; 242.443,99.238 cw(c242.443,99.662) 242.122,99.384 ccw(c242.443,99.662) 242.443,99.238 ; 242.443,99.238 242.621,99.416 242.621,100.381 ; 242.621,100.381 cw(c242.853,100.149) 242.874,100.476 ccw(c242.853,100.149) 242.621,100.381
NetR13_2: R13.2 U4.12 | length 4.3
  Top Layer w0.152: R13.2@240.843,102.438 241.833,102.438 242.572,101.7 U4.12@243.125,101.7 ; 241.383,102.438 ccw(c241.383,101.898) 241.001,102.28 cw(c241.383,101.898) 241.383,102.438 ; 241.383,102.438 cw(c241.383,102.978) 241.001,102.596 ccw(c241.383,102.978) 241.383,102.438
NetR29A_1: R29A.1 U1A.4 | length 4.5
  Top Layer w0.254: R29A.1@273.246,70.739 273.914,70.739 274.306,71.131 U1A.4@274.306,72.309 ; 273.664,70.739 ccw(c273.664,70.321) 273.368,70.617 cw(c273.664,70.321) 273.664,70.739 ; 273.664,70.739 cw(c273.664,71.157) 273.368,70.861 ccw(c273.664,71.157) 273.664,70.739 ; 274.306,71.548 ccw(c274.069,71.548) 274.236,71.715 cw(c274.069,71.548) 274.306,71.548 ; 274.306,71.548 cw(c274.542,71.548) 274.375,71.715 ccw(c274.542,71.548) 274.306,71.548
NetR29B_1: R29B.1 U1B.4 | length 4.8
  Top Layer w0.152: R29B.1@258.978,70.739 259.334,70.739 ; U1B.4@260.45,72.3 260.45,71.373 260.299,71.222 259.817,71.222 259.334,70.739 ; 259.334,70.739 ccw(c259.334,70.447) 259.104,70.627 cw(c259.334,70.447) 259.334,70.739 ; 259.334,70.739 cw(c259.334,70.971) 259.127,70.866 ccw(c259.334,70.971) 259.334,70.739 ; 260.45,71.416 ccw(c260.091,71.416) 260.345,71.67 cw(c260.091,71.416) 260.45,71.416 ; 260.45,71.416 cw(c260.81,71.416) 260.556,71.67 ccw(c260.81,71.416) 260.45,71.416
NetR29C_1: R29C.1 U1C.4 | length 4.3
  Top Layer w0.254: R29C.1@245.89,70.739 246.355,70.739 246.95,71.335 U1C.4@246.95,72.3 ; 246.308,70.739 ccw(c246.308,70.321) 246.013,70.617 cw(c246.308,70.321) 246.308,70.739 ; 246.308,70.739 cw(c246.308,71.157) 246.013,70.861 ccw(c246.308,71.157) 246.308,70.739 ; 246.95,71.538 ccw(c246.714,71.538) 246.881,71.706 cw(c246.714,71.538) 246.95,71.538 ; 246.95,71.538 cw(c247.187,71.538) 247.02,71.706 ccw(c247.187,71.538) 246.95,71.538
NetR29D_1: R29D.1 U1D.4 | length 4.5
  Top Layer w0.254: R29D.1@232.581,70.714 233.299,70.714 233.6,71.015 U1D.4@233.6,72.339 ; 232.998,70.714 ccw(c232.998,70.296) 232.703,70.591 cw(c232.998,70.296) 232.998,70.714 ; 232.998,70.714 cw(c232.998,71.131) 232.703,70.836 ccw(c232.998,71.131) 232.998,70.714 ; 233.6,71.578 ccw(c233.364,71.578) 233.531,71.745 cw(c233.364,71.578) 233.6,71.578 ; 233.6,71.578 cw(c233.837,71.578) 233.67,71.745 ccw(c233.837,71.578) 233.6,71.578
NetUSB_0: USB.0 USB.0a | length 32.7
  Top Layer w0.254: USB.0@229.641,107.95 USB.0a@232.241,107.95 ; USB.0a@231.523,107.76 ccw(c230.956,107.561) 231.111,108.141 ccw(c231.21,108.511) USB.0a@231.555,108.345 ; USB.0a@231.523,108.14 cw(c230.956,108.339) 231.111,107.759 cw(c231.21,107.389) USB.0a@231.555,107.555 ; USB.0@230.402,107.95 ccw(c230.402,109.79) 231.703,108.489 cw(c230.402,109.79) USB.0@230.402,107.95 ; USB.0@230.402,107.95 cw(c230.402,106.11) 231.703,107.411 ccw(c230.402,106.11) USB.0@230.402,107.95 ; USB.0@230.553,107.549 cw(c230.956,107.325) 231.075,107.77 ; USB.0@230.553,107.549 cw(c230.956,107.325) 231.075,107.77 ; USB.0@230.553,107.549 cw(c230.956,107.325) 231.075,107.77 ; USB.0@230.553,108.351 ccw(c230.956,108.575) 231.075,108.13 ; USB.0@230.553,108.351 ccw(c230.956,108.575) 231.075,108.13 ; USB.0@230.553,108.351 ccw(c230.956,108.575) 231.075,108.13 ; USB.0@230.617,107.696 cw(c231.246,107.492) 231.075,108.13 ; USB.0@230.617,107.696 cw(c231.246,107.492) 231.075,108.13 ; USB.0@230.617,107.696 cw(c231.246,107.492) 231.075,108.13 ; USB.0@230.617,108.204 ccw(c231.246,108.408) 231.075,107.77 ; USB.0@230.617,108.204 ccw(c231.246,108.408) 231.075,107.77 ; USB.0@230.617,108.204 ccw(c231.246,108.408) 231.075,107.77 ; 231.015,107.95 ccw(c231.015,109.176) 231.882,108.309 cw(c231.015,109.176) 231.015,107.95 ; 231.015,107.95 cw(c231.015,106.724) 231.882,107.591 ccw(c231.015,106.724) 231.015,107.95 ; 231.212,107.95 ccw(c231.212,106.57) 230.236,107.546 cw(c231.212,106.57) 231.212,107.95 ; 231.212,107.95 cw(c231.212,109.33) 230.236,108.354 ccw(c231.212,109.33) 231.212,107.95 ; USB.0a@231.825,107.95 ccw(c231.825,105.957) 230.416,107.366 cw(c231.825,105.957) USB.0a@231.825,107.95 ; USB.0a@231.825,107.95 cw(c231.825,109.943) 230.416,108.534 ccw(c231.825,109.943) USB.0a@231.825,107.95
NetUSB_0b: USB.0b USB.0c | length 32.7
  Top Layer w0.254: USB.0b@234.541,107.95 USB.0c@237.141,107.95 ; USB.0b@235.228,107.555 cw(c235.572,107.389) 235.671,107.759 cw(c235.827,108.339) USB.0b@235.26,108.14 ; USB.0b@235.228,108.345 ccw(c235.572,108.511) 235.671,108.141 ccw(c235.827,107.561) USB.0b@235.26,107.76 ; USB.0b@234.958,107.95 ccw(c234.958,109.943) 236.367,108.534 cw(c234.958,109.943) USB.0b@234.958,107.95 ; USB.0b@234.958,107.95 cw(c234.958,105.957) 236.367,107.366 ccw(c234.958,105.957) USB.0b@234.958,107.95 ; 235.571,107.95 ccw(c235.571,109.33) 236.547,108.354 cw(c235.571,109.33) 235.571,107.95 ; 235.571,107.95 cw(c235.571,106.57) 236.547,107.546 ccw(c235.571,106.57) 235.571,107.95 ; 235.708,107.77 ccw(c235.537,108.408) USB.0c@236.166,108.204 ; 235.708,107.77 cw(c235.827,107.325) USB.0c@236.229,107.549 ; 235.708,107.77 ccw(c235.537,108.408) USB.0c@236.166,108.204 ; 235.708,107.77 cw(c235.827,107.325) USB.0c@236.229,107.549 ; 235.708,107.77 ccw(c235.537,108.408) USB.0c@236.166,108.204 ; 235.708,107.77 cw(c235.827,107.325) USB.0c@236.229,107.549 ; 235.708,108.13 ccw(c235.827,108.575) USB.0c@236.229,108.351 ; 235.708,108.13 cw(c235.537,107.492) USB.0c@236.166,107.696 ; 235.708,108.13 ccw(c235.827,108.575) USB.0c@236.229,108.351 ; 235.708,108.13 cw(c235.537,107.492) USB.0c@236.166,107.696 ; 235.708,108.13 ccw(c235.827,108.575) USB.0c@236.229,108.351 ; 235.708,108.13 cw(c235.537,107.492) USB.0c@236.166,107.696 ; 235.768,107.95 ccw(c235.768,106.724) 234.901,107.591 cw(c235.768,106.724) 235.768,107.95 ; 235.768,107.95 cw(c235.768,109.176) 234.901,108.309 ccw(c235.768,109.176) 235.768,107.95 ; USB.0c@236.381,107.95 ccw(c236.381,106.11) 235.08,107.411 cw(c236.381,106.11) USB.0c@236.381,107.95 ; USB.0c@236.381,107.95 cw(c236.381,109.79) 235.08,108.489 ccw(c236.381,109.79) USB.0c@236.381,107.95
NTC75K: "BAT CON.3" R16.1 U4.17 | length 47.2
  Top Layer w0.2: v2(244.119,98.984) 244.125,98.99 U4.17@244.125,99.9 ; v2@243.978,99.125 ccw(c243.622,99.481) 244.125,99.481 cw(c243.622,99.481) v2@243.978,99.125 ; 244.125,99.452 ccw(c244.588,99.452) 244.261,99.125 cw(c244.588,99.452) 244.125,99.452
  Bottom Layer w0.2: R16.1@244.012,98.37 ccw(c243.898,98.568) 244.119,98.509 ; v2@244.112,98.977 R16.1@244.112,98.196 246.71,98.196 246.837,98.323 ; 244.147,98.613 ccw(c244.384,98.549) R16.1@244.234,98.355 ; 244.112,98.679 ccw(c244.595,98.679) R16.1@244.254,98.338 ; 244.112,98.679 cw(c243.629,98.679) 243.971,98.338 ccw(c243.629,98.679) 244.112,98.679 ; 244.112,98.679 ccw(c244.595,98.679) R16.1@244.254,98.338 ; R16.1@244.254,98.338 ccw(c244.595,98.679) 244.595,98.196 ; R16.1@244.254,98.338 ccw(c244.595,98.679) 244.595,98.196 ; 244.595,98.196 ccw(c244.595,97.714) 244.254,98.055 cw(c244.595,97.714) 244.595,98.196 ; v2@243.978,98.842 cw(c243.654,98.518) 244.112,98.518 ccw(c243.654,98.518) v2@243.978,98.842 ; R16.1@244.112,98.484 cw(c244.62,98.484) 244.261,98.842 ccw(c244.62,98.484) R16.1@244.112,98.484
  Bottom Layer w0.203: 246.837,98.323 247.853,99.339 247.853,103.378 248.356,103.881 264.159,103.881 ; 264.874,103.53 cw(c265.014,102.141) 266.084,103.038 ; 265.8,102.8 265.241,102.8 264.159,103.881 ; 264.159,103.881 ccw(c265.052,104.774) 265.499,103.593 cw(c265.052,104.774) 264.159,103.881 ; 264.382,103.659 ccw(c265.174,104.451) 265.571,103.403 cw(c265.174,104.451) 264.382,103.659 ; 264.604,103.437 ccw(c265.296,104.129) 265.643,103.213 cw(c265.296,104.129) 264.604,103.437 ; 264.747,103.293 cw(c264.254,102.8) 264.952,102.8 ccw(c264.254,102.8) 264.747,103.293 ; 264.826,103.214 ccw(c265.419,103.807) 265.715,103.023 cw(c265.419,103.807) 264.826,103.214
PROG_RXD: SWD.9 U2.31 U3.26 | length 36.9
  Top Layer w0.254: U3.26@236.704,97.384 237.719,97.384 238.125,96.977 238.125,92.786 243.712,87.199 U2.31@252.733,87.199 ; 251.117,87.199 cw(c251.117,86.779) 251.414,87.076 ccw(c251.117,86.779) 251.117,87.199 ; 251.12,87.199 ccw(c251.12,87.614) 251.414,87.321 cw(c251.12,87.614) 251.12,87.199 ; v1@251.659,87.076 cw(c251.955,86.779) 251.955,87.199 ccw(c251.955,86.779) v1@251.659,87.076 ; v1@251.659,87.321 ccw(c251.952,87.614) 251.952,87.199 cw(c251.952,87.614) v1@251.659,87.321
  Bottom Layer w0.254: v1(251.536,87.198) 252.334,86.4 258.8,86.4 259.573,87.173 SWD.9@261.188,87.173 ; 251.832,86.903 ccw(c251.536,86.608) 251.536,87.025 cw(c251.536,86.608) 251.832,86.903 ; 251.832,86.903 cw(c252.127,87.198) 251.709,87.198 ccw(c252.127,87.198) 251.832,86.903
PROG_TXD: SWD.3 U2.32 U3.25 | length 48.2
  Top Layer w0.254: U3.25@236.699,96.889 237.273,96.889 237.617,96.545 237.617,92.481 243.55,86.549 246.913,86.549 U2.32@252.733,86.549 ; 246.291,86.549 cw(c246.291,86.094) 246.613,86.415 ccw(c246.291,86.094) 246.291,86.549 ; 246.345,86.549 ccw(c246.345,86.929) 246.613,86.66 cw(c246.345,86.929) 246.345,86.549 ; v1@246.858,86.415 cw(c247.18,86.094) 247.18,86.549 ccw(c247.18,86.094) v1@246.858,86.415 ; v1@246.858,86.66 ccw(c247.127,86.929) 247.127,86.549 cw(c247.127,86.929) v1@246.858,86.66
  Bottom Layer w0.254: v1(246.736,86.538) 246.748,86.55 246.748,89.91 249.34,92.502 253.954,92.502 254.33,92.126 258.394,92.126 259.537,90.983 SWD.3@261.188,90.983 ; 260.529,90.983 ccw(c260.529,91.642) 260.995,91.176 cw(c260.529,91.642) 260.529,90.983 ; 260.529,90.983 cw(c260.529,90.324) 260.995,90.79 ccw(c260.529,90.324) 260.529,90.983 ; v1@246.613,86.66 ccw(c246.287,86.986) 246.748,86.986 cw(c246.287,86.986) v1@246.613,86.66 ; 246.748,86.925 ccw(c247.123,86.925) 246.858,86.66 cw(c247.123,86.925) 246.748,86.925
RES: R41.1 U2.23 | length 6.9
  Top Layer w0.254: v1(254.102,93.548) 254.483,93.167 U2.23@254.483,92.199 ; 254.397,93.253 ccw(c254.102,92.958) 254.102,93.375 cw(c254.102,92.958) 254.397,93.253 ; 254.397,93.253 cw(c254.692,93.548) 254.275,93.548 ccw(c254.692,93.548) 254.397,93.253
  Bottom Layer w0.254: R41.1@254.025,94.412 254.025,93.878 ; 254.086,93.924 cw(c254.51,94.038) R41.1@254.162,94.306 ; v1(254.102,93.548) 254.102,93.802 254.025,93.878 ; 254.025,93.878 ccw(c254.196,93.878) 254.149,93.715 cw(c254.196,93.878) 254.025,93.878 ; 254.025,93.994 ccw(c253.608,93.994) 253.903,94.289 cw(c253.608,93.994) 254.025,93.994 ; 254.025,93.994 cw(c254.443,93.994) 254.148,94.289 ccw(c254.443,93.994) 254.025,93.994 ; R41.1@254.025,94.15 ccw(c254.703,94.15) 254.224,93.671 cw(c254.703,94.15) R41.1@254.025,94.15
RESET: R17.2 SWD.6 U2.2 | length 31.2
  Top Layer w0.254: v1(254.127,84.506) 254.483,84.862 U2.2@254.483,85.449 ; v1@254.289,84.566 cw(c254.511,84.647) 254.393,84.852 ; 254.379,84.941 cw(c254.644,84.87) U2.2@254.507,85.107 ; v1@254.082,84.673 ccw(c253.951,85.163) 254.39,84.909 ; v1@254.082,84.673 ccw(c253.951,85.163) 254.39,84.909 ; v1@254.082,84.673 ccw(c253.951,85.163) 254.39,84.909 ; v1@254.294,84.551 cw(c254.611,84.636) 254.327,84.8 ; v1@254.294,84.551 cw(c254.611,84.636) 254.327,84.8 ; v1@254.294,84.551 cw(c254.611,84.636) 254.327,84.8 ; 254.422,84.801 ccw(c254.718,84.506) 254.3,84.506 cw(c254.718,84.506) 254.422,84.801 ; 254.422,84.801 cw(c254.127,85.096) 254.127,84.679 ccw(c254.127,85.096) 254.422,84.801 ; v1@254.198,84.577 ccw(c253.627,85.149) 254.435,85.149 cw(c253.627,85.149) v1@254.198,84.577
  Bottom Layer w0.203: R17.2@253.76,83.11 253.76,82.435 ; 259.512,82.296 253.898,82.296 253.76,82.435 ; 253.76,82.435 ccw(c253.28,82.435) 253.558,82.826 cw(c253.28,82.435) 253.76,82.435 ; 253.76,82.435 cw(c254.239,82.435) 253.962,82.826 ccw(c254.239,82.435) 253.76,82.435
  Bottom Layer w0.254: R17.2@253.76,83.11 253.76,84.139 v1(254.127,84.506) ; 259.512,82.296 263.271,86.055 263.271,88.9 SWD.6@262.458,89.713 ; 253.76,83.889 ccw(c254.54,83.889) 253.988,83.338 cw(c254.54,83.889) 253.76,83.889 ; 253.76,83.889 cw(c252.98,83.889) 253.531,83.338 ccw(c252.98,83.889) 253.76,83.889 ; 253.832,84.21 ccw(c253.536,84.506) 253.954,84.506 cw(c253.536,84.506) 253.832,84.21 ; 253.832,84.21 cw(c254.127,83.915) 254.127,84.333 ccw(c254.127,83.915) 253.832,84.21 ; 262.924,89.247 ccw(c262.458,88.781) 262.458,89.44 cw(c262.458,88.781) 262.924,89.247 ; 262.924,89.247 cw(c263.39,89.713) 262.731,89.713 ccw(c263.39,89.713) 262.924,89.247
SCE: R40.1 U2.24 | length 6.7
  Top Layer w0.254: v1(252.959,93.574) 253.365,93.167 253.644,93.167 253.833,92.978 U2.24@253.833,92.199 ; 253.254,93.278 ccw(c252.959,92.983) 252.959,93.401 cw(c252.959,92.983) 253.254,93.278 ; 253.254,93.278 cw(c253.549,93.574) 253.132,93.574 ccw(c253.549,93.574) 253.254,93.278
  Bottom Layer w0.254: v1(252.959,93.574) R40.1@252.959,94.412 ; 252.959,93.991 ccw(c253.376,93.991) 253.081,93.696 cw(c253.376,93.991) 252.959,93.991 ; 252.959,93.991 cw(c252.541,93.991) 252.836,93.696 ccw(c252.541,93.991) 252.959,93.991 ; 252.959,93.994 ccw(c252.541,93.994) 252.836,94.289 cw(c252.541,93.994) 252.959,93.994 ; 252.959,93.994 cw(c253.376,93.994) 253.081,94.289 ccw(c253.376,93.994) 252.959,93.994
SCL: IC1.6 R23.2 U2.10 | length 21.5
  Top Layer w0.203: U2.10@259.483,87.199 260.197,87.199 260.744,86.652 ; 260.852,86.544 260.744,86.652 ; IC1.6@264.825,87.77 263.665,87.77 ; 259.96,87.199 ccw(c259.96,87.022) 259.835,87.147 cw(c259.96,87.022) 259.96,87.199 ; 259.96,87.199 cw(c259.96,87.376) 259.835,87.251 ccw(c259.96,87.376) 259.96,87.199 ; 260.744,86.652 260.877,86.519 262.82,86.519 263.423,87.122 263.423,87.528 263.665,87.77 ; 263.665,87.77 ccw(c263.665,88.165) 263.962,87.904 cw(c263.665,88.165) 263.665,87.77 ; 263.665,87.77 cw(c263.665,87.375) 263.962,87.636 ccw(c263.665,87.375) 263.665,87.77
  Top Layer w0.254: IC1.6@264.825,87.77 266.382,87.77 267.36,86.792 267.36,85.496 268.362,84.495 R23.2@268.362,84.074 ; 267.988,84.824 ccw(c268.943,85.08) R23.2@268.448,84.224 ; 265.966,87.77 ccw(c265.966,87.341) 265.662,87.644 cw(c265.966,87.341) 265.966,87.77 ; 265.966,87.77 cw(c265.966,88.199) 265.662,87.896 ccw(c265.966,88.199) 265.966,87.77 ; 268.362,84.492 ccw(c268.78,84.492) 268.484,84.196 cw(c268.78,84.492) 268.362,84.492 ; 268.362,84.492 cw(c267.944,84.492) 268.24,84.196 ccw(c267.944,84.492) 268.362,84.492 ; 267.769,85.088 cw(c266.755,84.074) 268.189,84.074 ccw(c266.755,84.074) 267.769,85.088 ; 268.203,84.654 cw(c267.623,84.074) 268.443,84.074 ccw(c267.623,84.074) 268.203,84.654
SCLK: "SD CON.5" R21.2 R44.1 U1A.28 U1B.28 U1C.28 U1D.28 U2.15 | length 125.4
  Top Layer w0.152: 260.35,91.618 v1(263.169,91.618) ; 262.629,91.618 ccw(c262.629,92.158) 263.011,91.776 cw(c262.629,92.158) 262.629,91.618 ; 262.629,91.618 cw(c262.629,91.078) 263.011,91.46 ccw(c262.629,91.078) 262.629,91.618
  Top Layer w0.254: v1(231.648,75.336) U1D.28@231.648,78.116 ; v1(244.196,74.422) 244.196,76.352 245,77.157 U1C.28@245,78.1 ; v1(257.962,74.422) 257.962,76.048 258.5,76.586 U1B.28@258.5,78.1 258.5,79.142 258.318,79.324 v1(258.318,80.645) ; 259.944,104.978 259.944,103.784 260.223,103.505 v1(260.223,102.083) ; v1(271.526,74.422) 271.912,74.808 271.912,76.103 272.364,76.556 U1A.28@272.364,78.101 ; 231.648,75.754 ccw(c232.066,75.754) 231.77,75.459 cw(c232.066,75.754) 231.648,75.754 ; 231.648,75.754 cw(c231.23,75.754) 231.526,75.459 ccw(c231.23,75.754) 231.648,75.754 ; 244.196,74.84 ccw(c244.613,74.84) 244.318,74.544 cw(c244.613,74.84) 244.196,74.84 ; 244.196,74.84 cw(c243.778,74.84) 244.073,74.544 ccw(c243.778,74.84) 244.196,74.84 ; 245,77.338 ccw(c244.764,77.338) 244.931,77.506 cw(c244.764,77.338) 245,77.338 ; 245,77.338 cw(c245.237,77.338) 245.07,77.506 ccw(c245.237,77.338) 245,77.338 ; 257.962,74.84 ccw(c258.38,74.84) 258.085,74.544 cw(c258.38,74.84) 257.962,74.84 ; 257.962,74.84 cw(c257.545,74.84) 257.84,74.544 ccw(c257.545,74.84) 257.962,74.84 ; 258.318,80.227 ccw(c257.9,80.227) 258.196,80.523 cw(c257.9,80.227) 258.318,80.227 ; 258.318,80.227 cw(c258.736,80.227) 258.44,80.523 ccw(c258.736,80.227) 258.318,80.227 ; 258.5,77.338 ccw(c258.264,77.338) 258.431,77.506 cw(c258.264,77.338) 258.5,77.338 ; 258.5,77.338 cw(c258.737,77.338) 258.57,77.506 ccw(c258.737,77.338) 258.5,77.338 ; 258.5,78.862 ccw(c258.737,78.862) 258.57,78.694 cw(c258.737,78.862) 258.5,78.862 ; 258.5,78.862 cw(c258.264,78.862) 258.431,78.694 ccw(c258.264,78.862) 258.5,78.862 ; 259.944,103.969 ccw(c259.285,103.969) 259.751,104.435 cw(c259.285,103.969) 259.944,103.969 ; 259.944,103.969 cw(c260.603,103.969) 260.137,104.435 ccw(c260.603,103.969) 259.944,103.969 ; 260.223,102.5 ccw(c260.641,102.5) 260.345,102.205 cw(c260.641,102.5) 260.223,102.5 ; 260.223,102.5 cw(c259.805,102.5) 260.101,102.205 ccw(c259.805,102.5) 260.223,102.5 ; 271.821,74.717 ccw(c272.117,74.422) 271.699,74.422 cw(c272.117,74.422) 271.821,74.717 ; 271.821,74.717 cw(c271.526,75.013) 271.526,74.595 ccw(c271.526,75.013) 271.821,74.717 ; U1D.28@231.581,77.545 cw(c231.42,77.383) 231.648,77.383 ccw(c231.42,77.383) U1D.28@231.581,77.545 ; 231.648,77.372 cw(c231.893,77.372) 231.72,77.545 ccw(c231.893,77.372) 231.648,77.372 ; U1A.28@272.286,77.515 cw(c272.098,77.327) 272.364,77.327 ccw(c272.098,77.327) U1A.28@272.286,77.515
  Top Layer w0.305: U2.15@259.483,90.449 260.07,90.449 260.325,90.703 260.325,91.948 259.69,92.583 v1(259.69,93.574) ; 259.69,93.217 ccw(c259.333,93.217) 259.585,93.469 cw(c259.333,93.217) 259.69,93.217 ; 259.69,93.217 cw(c260.046,93.217) 259.794,93.469 ccw(c260.046,93.217) 259.69,93.217 ; U2.15@259.783,90.471 ccw(c259.783,91.218) 260.311,90.69 cw(c259.783,91.218) U2.15@259.783,90.471
  Bottom Layer w0.254: v1(231.648,75.336) 232.512,74.473 v1@244.17,74.422 ; v1(244.196,74.422) v1(257.962,74.422) v1@257.912,74.473 ; v1@257.962,74.473 258.013,74.422 270.383,74.422 ; v1(258.318,80.645) 258.318,80.747 259.207,81.636 259.664,81.636 263.83,85.801 263.83,91.008 263.22,91.618 v1(263.169,91.618) ; R44.1@259.69,94.361 260.299,94.361 260.477,94.539 260.477,98.196 260.223,98.45 v1(260.223,102.083) ; 260.281,100.704 R21.2@261.087,100.704 ; 270.591,74.422 270.383,74.422 ; v1(271.526,74.422) 270.383,74.422 ; 231.943,75.041 ccw(c231.648,74.746) 231.648,75.163 cw(c231.648,74.746) 231.943,75.041 ; 231.943,75.041 cw(c232.239,75.336) 231.821,75.336 ccw(c232.239,75.336) 231.943,75.041 ; 243.778,74.424 ccw(c243.779,74.842) 244.074,74.545 cw(c243.779,74.842) 243.778,74.424 ; 243.778,74.424 cw(c243.776,74.006) 244.073,74.3 ccw(c243.776,74.006) 243.778,74.424 ; 244.613,74.422 ccw(c244.613,74.004) 244.318,74.3 cw(c244.613,74.004) 244.613,74.422 ; 244.613,74.422 cw(c244.613,74.84) 244.318,74.544 ccw(c244.613,74.84) 244.613,74.422 ; 257.545,74.422 ccw(c257.545,74.84) 257.84,74.544 cw(c257.545,74.84) 257.545,74.422 ; 257.545,74.422 cw(c257.545,74.004) 257.84,74.3 ccw(c257.545,74.004) 257.545,74.422 ; 258.38,74.422 ccw(c258.38,74.004) 258.085,74.3 cw(c258.38,74.004) 258.38,74.422 ; 258.38,74.422 cw(c258.38,74.84) 258.085,74.544 ccw(c258.38,74.84) 258.38,74.422 ; 260.107,94.361 ccw(c260.107,93.943) 259.812,94.239 cw(c260.107,93.943) 260.107,94.361 ; 260.107,94.361 cw(c260.107,94.779) 259.812,94.483 ccw(c260.107,94.779) 260.107,94.361 ; 260.223,101.665 ccw(c259.805,101.665) 260.101,101.96 cw(c259.805,101.665) 260.223,101.665 ; 260.223,101.665 cw(c260.641,101.665) 260.345,101.96 ccw(c260.641,101.665) 260.223,101.665 ; 260.669,100.704 ccw(c260.669,101.121) 260.964,100.826 cw(c260.669,101.121) 260.669,100.704 ; 260.669,100.704 cw(c260.669,100.286) 260.964,100.581 ccw(c260.669,100.286) 260.669,100.704 ; 271.108,74.422 ccw(c271.108,74.84) 271.404,74.544 cw(c271.108,74.84) 271.108,74.422 ; 271.108,74.422 cw(c271.108,74.004) 271.404,74.3 ccw(c271.108,74.004) 271.108,74.422 ; v1@258.491,80.645 cw(c259.154,80.645) 258.685,81.114 ccw(c259.154,80.645) v1@258.491,80.645 ; v1@263.169,91.445 cw(c263.169,90.905) 263.551,91.287 ccw(c263.169,90.905) v1@263.169,91.445 ; v1@263.342,91.618 ccw(c263.637,91.618) 263.429,91.409 cw(c263.637,91.618) v1@263.342,91.618
  Bottom Layer w0.305: v1(259.69,93.574) R44.1@259.69,94.361 ; 259.69,93.93 ccw(c260.046,93.93) 259.794,93.678 cw(c260.046,93.93) 259.69,93.93 ; 259.69,93.93 cw(c259.333,93.93) 259.585,93.678 ccw(c259.333,93.93) 259.69,93.93 ; 259.69,94.005 ccw(c259.333,94.005) 259.585,94.257 cw(c259.333,94.005) 259.69,94.005 ; 259.69,94.005 cw(c260.046,94.005) 259.794,94.257 ccw(c260.046,94.005) 259.69,94.005